# Altium PCB main.PcbDoc (part 3 of 3)
Units mm, origin at the board's own origin, x right, y up, seen from the top; angles counter-clockwise.
Board outline 60 x 99 mm, 4 copper layers (Top Layer, Ground Layer, Power Layer, Bottom Layer), stack 1.591 mm thick; 202 components, 164 nets, 893 pads, 275 vias.
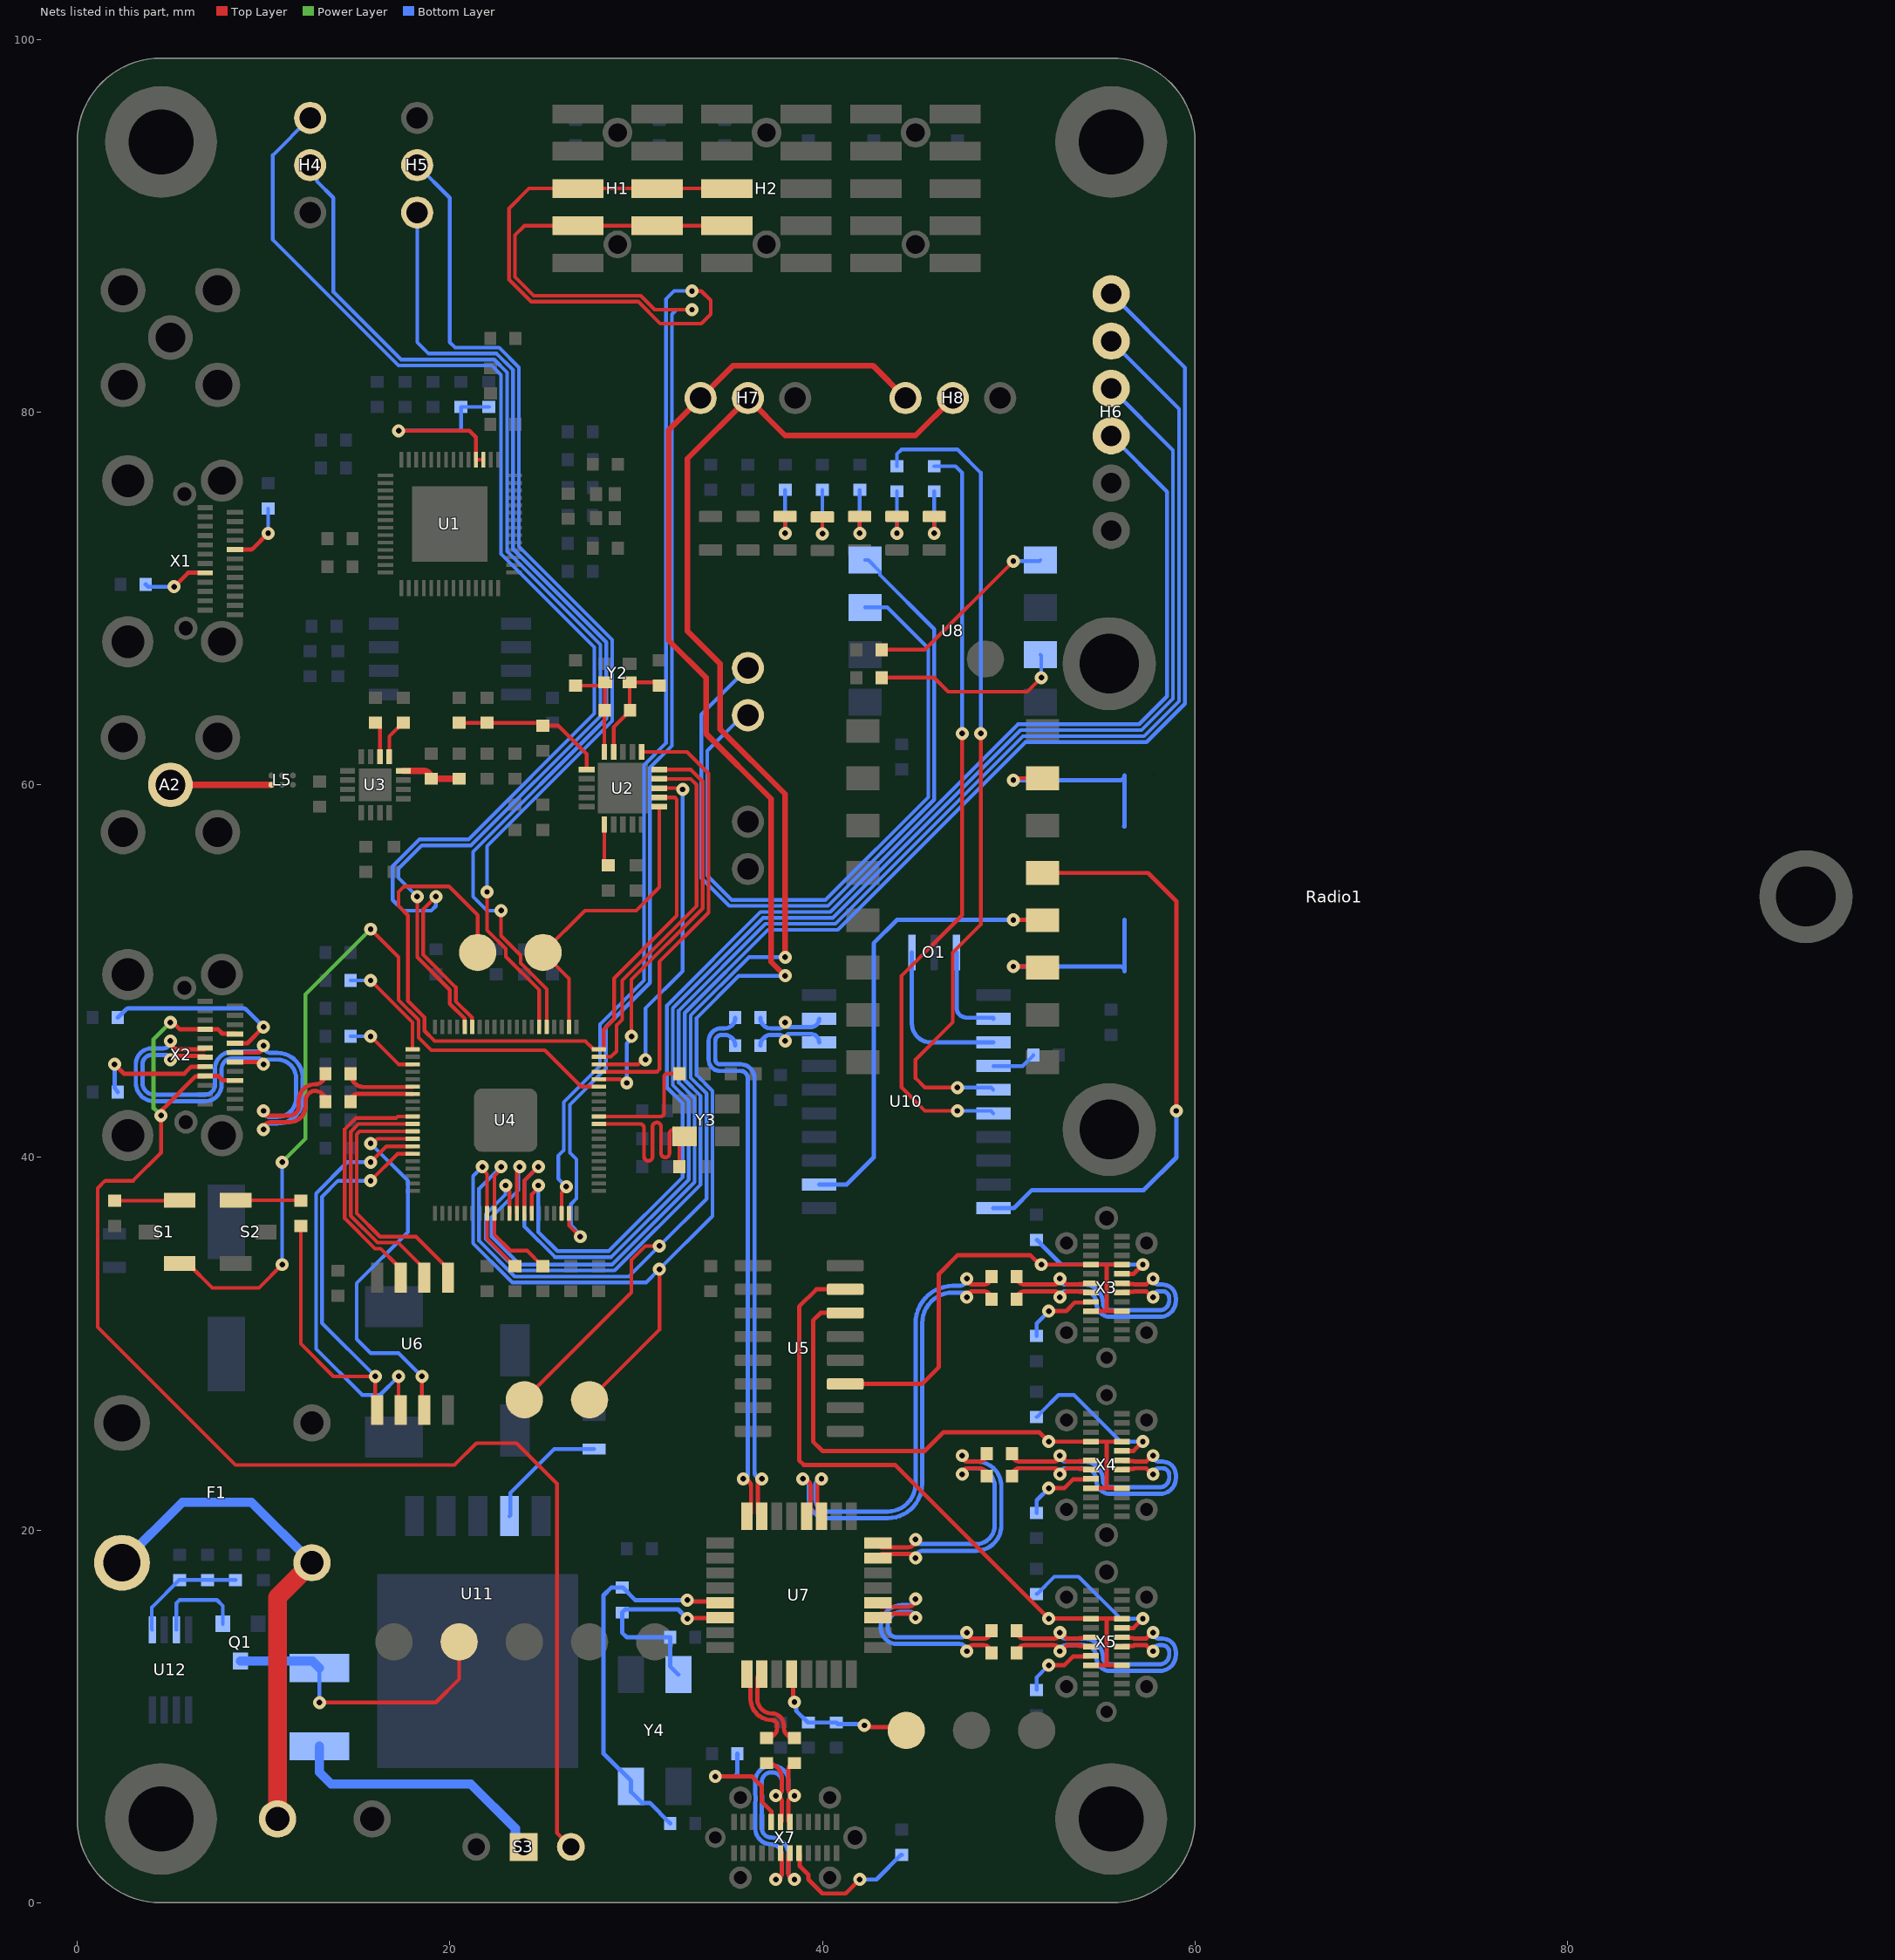
[diagram p5: the nets of this part, all layers, seen from the top]

## Via types
v1: diameter 0.7, hole 0.3, Top Layer to Bottom Layer, 275 vias

## Nets (pads, with @x,y where several pads share a name; then routed paths per layer and width w, separated by ;. In a path a pad name is that pad's centre, name@x,y a point inside that pad or via, vN(x,y) a via of type N, cw(c..) or ccw(c..) an arc to the next point about the centre after c; other vN are vias at no path point) (continued)
NetD3_1: D3.1 R27.1 | length 3.2
  Top Layer w0.2: v1(38,73.5) D3.1@38,74.4
  Bottom Layer w0.2: v1(38,73.5) R27.1@38,75.825
NetD4_1: D4.1 R25.1 | length 3.2
  Top Layer w0.2: v1(42,73.5) D4.1@42,74.4
  Bottom Layer w0.2: v1(42,73.5) R25.1@42,75.825
NetD5_1: D5.1 R31.1 | length 3.1
  Top Layer w0.2: v1(44,73.5) D5.1@44,74.4
  Bottom Layer w0.2: v1(44,73.5) R31.1@44,75.75
NetD6_1: D6.1 R30.1 | length 3.1
  Top Layer w0.2: v1(46,73.5) D6.1@46,74.4
  Bottom Layer w0.2: v1(46,73.5) R30.1@46,75.75
NetD7_1: D7.1 R26.1 | length 3.3
  Top Layer w0.2: v1(40,73.474) D7.1@40.001,74.374
  Bottom Layer w0.2: v1(40,73.474) R26.1@40,75.825
NetF1_2: F1.2 X6.1 | length 27.4
  Top Layer w1: X6.1@10.75,4.5 10.75,16.4 F1.2@12.6,18.25
  Bottom Layer w0.5: F1.2@2.4,18.25 5.65,21.5 9.35,21.5 F1.2@12.6,18.25
NetF2_1: F2.1 S3.2 | length 14.3
  Bottom Layer w0.5: F2.1@13,8.4 13,7 13.625,6.375 21.125,6.375 23.519,3.981 23.519,3.441 S3.2@23.96,3
NetL9_1: L9.1 U11.4 | length 6.7
  Bottom Layer w0.2: U11.4@23.2,20.75 23.249,20.799 23.249,21.999 25.6,24.35 L9.1@27.75,24.35
NetR4_2: R4.2 U8.1 | length 10.5
  Top Layer w0.2: R4.2@43.175,67.25 45.5,67.25 v1(50.25,72)
  Bottom Layer w0.2: v1(50.25,72) 51.645,72 U8.1@51.705,72.06
NetR5_1: R5.1 U8.3 | length 10.4
  Top Layer w0.2: R5.1@43.175,65.75 46,65.75 46.75,65 51,65 v1(51.75,65.75)
  Bottom Layer w0.2: U8.3@51.705,66.98 51.75,66.935 v1(51.75,65.75)
NetR6_2: R6.2 U3.6 | length 1.9
  Top Layer w0.2: R6.2@16,63.325 16.025,63.325 16.25,63.1 U3.6@16.25,61.5
NetR7_2: R7.2 U3.5 | length 2.2
  Top Layer w0.2: U3.5@16.75,61.5 16.75,62.6 17.475,63.325 R7.2@17.5,63.325
NetR9_2: R9.2 U2.16 | length 2.3
  Top Layer w0.2: U2.16@28.295,57.868 28.295,55.88 R9.2@28.5,55.675
NetR13_1: R13.1 S1.2 | length 3.5
  Top Layer w0.2: R13.1@2,37.675 5.475,37.675 S1.2@5.5,37.7
NetR33_2: R33.2 X1.A5 | length 3.5
  Top Layer w0.23: X1.A5@8.465,72.625 9.295,72.625 ccw(c9.295,72.83) 9.44,72.686 v1(10.25,73.5)
  Bottom Layer w0.2: v1(10.25,73.5) R33.2@10.25,74.825
NetR35_1: R35.1 X1.B5 | length 3.6
  Top Layer w0.23: v1(5.2,70.625) 5.95,71.375 X1.B5@6.865,71.375
  Bottom Layer w0.23: R35.1@3.675,70.75 3.8,70.625 v1(5.2,70.625)
NetR38_2: R38.2 X2.A5 | length 10.3
  Top Layer w0.23: X2.A5@8.465,46.125 9.125,46.125 v1(10,47)
  Bottom Layer w0.23: R38.2@2.175,47.5 2.615,47.94 cw(c2.76,47.795) 2.76,48 8.915,48 cw(c8.915,47.795) 9.06,47.94 v1(10,47)
NetR41_1: R41.1 X2.B5 | length 6.8
  Top Layer w0.23: v1(2,45) 2.5,44.5 5.75,44.5 6.125,44.875 X2.B5@6.865,44.875
  Bottom Layer w0.23: v1(2,45) 2,43.735 R41.1@2.175,43.5
NetR42_1: R42.1 X3.B5 | length 7.6
  Top Layer w0.23: X3.B5@56.085,33.75 56.7,33.75 v1(57.2,34.25)
  Bottom Layer w0.23: R42.1@51.5,35.575 51.525,35.575 51.735,35.365 51.735,35.34 52.825,34.25 v1(57.2,34.25)
NetR43_2: R43.2 X3.A5 | length 4.1
  Top Layer w0.23: v1(52.15,31.75) 53.08,31.75 53.545,32.215 54.38,32.215 X3.A5@54.415,32.25
  Bottom Layer w0.23: R43.2@51.5,30.425 51.5,31.1 v1(52.15,31.75)
NetR44_2: R44.2 X4.A5 | length 8.6
  Top Layer w0.23: X4.A5@56.085,24.25 56.7,24.25 v1(57.2,24.75)
  Bottom Layer w0.2: R44.2@51.5,26.075 51.525,26.075 51.75,26.3 51.75,26.325 52.675,27.25 53.5,27.25 56,24.75 v1(57.2,24.75)
NetR45_1: R45.1 X4.B5 | length 4.1
  Top Layer w0.23: v1@52.05,22.25 52.98,22.25 53.445,22.715 54.28,22.715 X4.B5@54.315,22.75
  Bottom Layer w0.23: R45.1@51.5,20.925 51.5,21.6 v1(52.15,22.25)
NetR48_1: R48.1 X5.B5 | length 8.3
  Top Layer w0.23: X5.B5@56.085,14.75 56.7,14.75 v1(57.2,15.25)
  Bottom Layer w0.2: R48.1@51.5,16.575 51.525,16.575 52.45,17.5 53.75,17.5 56,15.25 v1(57.2,15.25)
NetR50_2: R50.2 X5.A5 | length 4.1
  Top Layer w0.23: v1@52.05,12.75 52.98,12.75 53.445,13.215 54.28,13.215 X5.A5@54.315,13.25
  Bottom Layer w0.2: R50.2@51.5,11.425 51.5,12.1 v1(52.15,12.75)
NetR52_2: R52.2 X7.A5 | length 7.2
  Top Layer w0.23: v1(34.25,6.775) 36.225,6.775 36.738,6.262 36.738,5.437 37.25,4.924 X7.A5@37.25,4.335
  Bottom Layer w0.23: v1(34.25,6.775) 35.275,6.775 35.425,6.925 R52.2@35.425,8 R52.2@35.462,7.962
NetR53_1: R53.1 X7.B5 | length 7.8
  Top Layer w0.23: X7.B5@38.75,2.665 38.785,2.63 38.785,1.965 39.25,1.5 39.25,1.25 40,0.5 41.25,0.5 v1(42,1.25)
  Bottom Layer w0.23: v1(42,1.25) 42.9,1.25 44.225,2.575 R53.1@44.25,2.575
"NRF CE": TP3.1 U2.1 U4.42 | length 16.6
  Top Layer w0.2: U4.42@26.4,47 26.4,49.6 TP3.1@25,51 27.25,53.25 30,53.25 31.245,54.495 U2.1@31.245,58.818
"NRF CS": TP2.1 U2.2 U4.40 | length 41.1
  Top Layer w0.2: TP2.1@21.5,51 21.5,53 19.95,54.55 17.55,54.55 17.25,54.25 17.25,53.5 17.75,53 17.75,48.405 18.64,47.515 18.64,46.793 19.183,46.25 27.27,46.25 27.72,45.8 U4.40@28,45.8 28.253,45.8 28.263,45.81 28.263,46.86 28.82,47.417 28.82,49.617 32.182,52.979 32.182,59.207 32.071,59.318 U2.2@31.245,59.318
"NRF INT": U2.6 U4.37 | length 24.4
  Top Layer w0.2: U4.37@28,44.6 31.13,44.6 31.25,44.72 31.25,45.845 31.25,50.5 33.89,53.14 33.89,60.61 32.732,61.768 U2.6@30.295,61.768
"NRF MISO": U2.5 U4.36 | length 22
  Top Layer w0.2: U4.36@28,44.2 29.165,44.2 29.365,44 v1(29.5,44) ; v1(29.75,46.5) 29.75,49.547 33.57,53.367 33.57,60.18 32.932,60.818 U2.5@31.245,60.818
  Bottom Layer w0.2: v1(29.5,44) 29.5,46.115 29.75,46.365 v1(29.75,46.5)
"NRF MOSI": U2.4 U4.39 | length 19.3
  Top Layer w0.2: U4.39@28,45.4 28.65,45.4 28.95,45.7 28.95,47.095 29.25,47.395 29.25,49.5 33.25,53.5 33.25,60 32.932,60.318 U2.4@31.245,60.318
"NRF SCK": U2.3 U4.38 | length 19.2
  Top Layer w0.2: U4.38@28,45 30.115,45 30.365,45.25 v1(30.5,45.25) ; U2.3@31.245,59.818 32.432,59.818 v1(32.5,59.75)
  Bottom Layer w0.2: v1(30.5,45.25) 30.5,48 32.5,50 v1(32.5,59.75)
"NRF XTAL 1": C5.1 R8.2 U2.10 Y2.1 | length 5.4
  Top Layer w0.2: C5.1@26.75,65.325 28.175,65.325 Y2.1@28.35,65.5 28.325,65.475 R8.2@28.325,64 28.295,63.97 U2.10@28.295,61.768
"NRF XTAL 2": C6.1 R8.1 U2.9 Y2.2 | length 5.8
  Top Layer w0.2: U2.9@28.795,61.768 28.795,63.095 29.675,63.975 29.65,64 Y2.2@29.65,65.5 31.075,65.5 C6.1@31.25,65.325
"Op B (+) Input": C64.2 R46.2 R47.1 U12.5 | length 6.3
  Bottom Layer w0.2: U12.5@4.025,14.65 4,14.675 4,15.85 5.475,17.325 R47.1@5.5,17.325 R46.2@7,17.325 C64.2@8.5,17.325
"Op B Output": Q1.1 U12.7 | length 5.1
  Bottom Layer w0.2: U12.7@5.325,14.65 5.325,16.075 5.5,16.25 7.5,16.25 7.813,15.937 Q1.1@7.813,14.97
OSC1: O1.1 U10.2 | length 5.3
  Bottom Layer w0.23: O1.1@47.2,51 47.2,48.05 ccw(c47.75,48.05) 47.75,47.5 49.12,47.5 cw(c49.12,47.445) U10.2@49.175,47.445
OSC2: O1.3 U10.3 | length 8.8
  Bottom Layer w0.23: O1.3@44.8,51 44.8,47.2 ccw(c45.825,47.2) 45.825,46.175 U10.3@49.175,46.175
QSPI_SCLK: U4.71 U6.6 | length 13.6
  Top Layer w0.2: U4.71@18,41.8 15.097,41.8 14.68,41.383 14.68,36.867 16.117,35.43 17.23,35.43 18.635,34.025 U6.6@18.635,33.55
QSPI_SD0: U4.72 U6.5 | length 13.9
  Top Layer w0.2: U4.72@18,41.4 15.15,41.4 15,41.25 15,37 16.25,35.75 18.18,35.75 19.68,34.25 19.905,34.025 U6.5@19.905,33.55
QSPI_SD1: U4.74 U6.2 | length 22.3
  Top Layer w0.2: v1(15.75,39.75) 16.6,40.6 U4.74@18,40.6 ; v1(17.25,28.25) 17.25,26.565 U6.2@17.365,26.45
  Bottom Layer w0.2: v1(15.75,39.75) 14.5,39.75 12.82,38.07 12.82,29.727 15.297,27.25 16.25,27.25 v1(17.25,28.25)
QSPI_SD2: U4.73 U6.3 | length 21
  Top Layer w0.2: v1(15.75,40.75) 15.861,40.75 16.111,41 16.25,41 U4.73@18,41 ; v1(18.5,28.25) 18.5,26.585 U6.3@18.635,26.45
  Bottom Layer w0.2: v1(15.75,40.75) 17.75,38.75 17.75,36 15,33.25 15,30.25 15.75,29.5 17.25,29.5 v1(18.5,28.25)
QSPI_SD3: U4.70 U6.7 | length 13.3
  Top Layer w0.2: U6.7@17.365,33.55 17.365,34.025 17.14,34.25 16.28,35.11 15.985,35.11 14.36,36.735 14.36,41.515 14.965,42.12 17.12,42.12 17.2,42.2 U4.70@18,42.2
QSPI_SS: R14.2 U4.75 U6.1 | length 29.5
  Top Layer w0.2: R14.2@12,36.325 12,30 13.75,28.25 v1(16,28.25) 16,26.545 U6.1@16.095,26.45 ; v1(15.75,38.75) 17.19,40.19 17.99,40.19 U4.75@18,40.2
  Bottom Layer w0.2: v1(15.75,38.75) 14,38.75 13.14,37.89 13.14,31.11 v1(16,28.25)
"Radio CTS": J1.1 J2.1 Radio1.3 | length 10.6
  Top Layer w0.23: v1(50.25,60.25) cw(c50.35,60.25) 50.35,60.35 Radio1.3@51.93,60.35
  Bottom Layer w0.23: v1(50.25,60.25) 55.97,60.25 ccw(c55.97,60.5) J1.1@56.22,60.5 56.22,57.78 cw(c56.19,57.78) J2.1@56.19,57.75
"Radio RTS": J3.1 J4.1 Radio1.11 | length 10.6
  Top Layer w0.23: v1(50.25,50.25) 51.87,50.25 cw(c51.87,50.19) Radio1.11@51.93,50.19
  Bottom Layer w0.23: v1(50.25,50.25) 55.97,50.25 cw(c55.97,50) J4.1@56.22,50 J3.1@56.22,52.75
"Radio RX": Radio1.7 U10.10 | length 32.4
  Top Layer w0.23: Radio1.7@51.91,55.25 ccw(c51.91,55.27) 51.93,55.27 57.48,55.27 59,53.75 v1(59,42.5)
  Bottom Layer w0.23: U10.10@49.175,37.285 50.285,37.285 51.25,38.25 57.25,38.25 59,40 v1(59,42.5)
"Radio TX": Radio1.9 U10.12 | length 24.7
  Top Layer w0.23: v1(50.25,52.75) 51.91,52.75 cw(c51.91,52.73) Radio1.9@51.93,52.73
  Bottom Layer w0.23: U10.12@39.825,38.555 41.305,38.555 42.75,40 42.75,51.5 44,52.75 v1(50.25,52.75)
Relay_1: H9.1 U8.8 | length 42.3
  Bottom Layer w0.2: H9.1@36,66.27 33.5,63.77 33.5,55 35,53.5 40.297,53.5 46,59.203 46,68.355 43.09,71.265 43.09,71.435 42.465,72.06 U8.8@42.295,72.06
Relay_2: H9.2 U8.7 | length 36.6
  Bottom Layer w0.2: H9.2@36,63.73 35.73,63.73 33.82,61.82 33.82,55.133 35.133,53.82 40.165,53.82 45.68,59.335 45.68,67.32 43.48,69.52 U8.7@42.295,69.52
"Right Motor Control 1": H1.5 H1.6 H2.5 U4.18 | length 83.2
  Top Layer w0.2: U4.18@26,37 26,38.115 26.25,38.365 v1(26.25,38.432) ; v1(33,86.5) 33.005,86.495 33.505,86.495 34,86 34,85.25 33.5,84.75 31.297,84.75 30.117,85.93 24.367,85.93 23.18,87.117 23.18,90.93 24.25,92 H1.5@26.875,92 H1.6@31.125,92 H2.5@34.875,92
  Bottom Layer w0.2: v1(26.25,38.432) 25.82,38.862 25.82,40.09 26.12,40.39 26.12,42.965 28.06,44.905 28.06,47.142 30.42,49.502 30.42,61.05 31.6,62.23 31.6,86.057 32.043,86.5 v1(33,86.5)
"Right Motor Control 2": H1.7 H1.8 H2.7 U4.19 | length 79
  Top Layer w0.2: U4.19@26.4,37 26.4,36.35 v1(27,35.75) ; v1(33,85.5) 31,85.5 30.25,86.25 24.5,86.25 23.5,87.25 23.5,89.5 24,90 H1.7@26.875,90 H1.8@31.125,90 H2.7@34.875,90
  Bottom Layer w0.2: v1(27,35.75) 27,35.861 26.5,36.361 26.5,37.5 26.8,37.8 26.8,39.897 26.44,40.257 26.44,42.832 28.38,44.772 28.38,47.01 30.74,49.37 30.74,60.917 31.92,62.097 31.92,85.25 32.17,85.5 v1(33,85.5)
RP2350-USB-5V-VIN: S3.1 X2.A4 X2.A9 X2.B4 X2.B9 | length 76.9
  Top Layer w0.2: v1(4.5,42.25) 4.5,40.25 3,38.75 1.5,38.75 1.1,38.35 1.1,30.9 8.5,23.5 20.25,23.5 21.421,24.671 23.579,24.671 25.75,22.5 25.75,3.75 S3.1@26.5,3
  Top Layer w0.23: v1(4.5,42.25) 4.59,42.34 4.59,42.59 6.355,44.355 6.845,44.355 X2.B4@6.865,44.375 7.56,44.375 7.79,44.145 8.445,44.145 X2.A9@8.465,44.125 ; v1(5,47.25) 5.127,47.25 5.502,46.875 X2.B9@6.865,46.875 7.56,46.875 7.79,46.645 8.445,46.645 X2.A4@8.465,46.625
  Power Layer w0.23: v1(4.5,42.25) 4.101,42.649 4.101,46.351 v1(5,47.25)
RP2350_D_N: R10.1 X2.A7 X2.B7 | length 27.5
  Top Layer w0.23: v1(5,46.25) ccw(c5.446,46.25) 5.446,45.804 6.794,45.804 ccw(c6.794,45.875) X2.B7@6.865,45.875 ; X2.A7@8.465,45.125 9.875,45.125 cw(c9.875,45) v1(10,45) ; v1(10,42.5) ccw(c10.25,42.5) 10.25,42.25 11.393,42.25 ccw(c11.393,42.75) 11.893,42.75 11.893,43.046 cw(c12.775,43.046) 12.775,43.929 ccw(c12.775,44.479) 13.325,44.479 R10.1@13.325,44.5
  Bottom Layer w0.23: v1(5,46.25) cw(c4.607,46.25) 4.607,45.857 4,45.857 ccw(c4,45) 3.143,45 3.143,44 ccw(c4.125,44) 4.125,43.018 6.865,43.018 ccw(c6.865,43.903) 7.75,43.903 7.75,44.75 cw(c8.321,44.75) 8.321,45.321 9.679,45.321 cw(c9.679,45) v1(10,45) cw(c10.25,45) 10.25,45.25 10.75,45.25 cw(c10.75,44.25) 11.75,44.25 11.75,43.179 cw(c10.75,43.179) 10.75,42.179 10.321,42.179 cw(c10.321,42.5) v1(10,42.5)
RP2350_D_P: R12.1 X2.A6 X2.B6 | length 27.6
  Top Layer w0.23: v1(5,45.25) cw(c5.196,45.25) 5.196,45.446 6.794,45.446 cw(c6.794,45.375) X2.B6@6.865,45.375 ; X2.A6@8.465,45.625 9.625,45.625 ccw(c9.625,46) v1(10,46) ; v1(10,41.5) cw(c10.393,41.5) 10.393,41.893 11.393,41.893 ccw(c11.393,42.75) 12.25,42.75 12.25,43.046 cw(c12.775,43.046) 12.775,43.571 cw(c12.775,43.021) 13.325,43.021 R12.1@13.325,43
  Bottom Layer w0.23: v1(5,45.25) ccw(c4.75,45.25) 4.75,45.5 4,45.5 ccw(c4,45) 3.5,45 3.5,44 ccw(c4.125,44) 4.125,43.375 6.865,43.375 ccw(c6.865,43.903) 7.393,43.903 7.393,44.75 cw(c8.321,44.75) 8.321,45.679 9.679,45.679 ccw(c9.679,46) v1(10,46) ccw(c10.393,46) 10.393,45.607 10.75,45.607 cw(c10.75,44.25) 12.107,44.25 12.107,43.179 cw(c10.75,43.179) 10.75,41.821 10.321,41.821 ccw(c10.321,41.5) v1(10,41.5)
RP2350_DX_N: R10.2 U4.66 | length 3.7
  Top Layer w0.23: R10.2@14.675,44.5 ccw(c15.396,44.5) 15.396,43.779 17.979,43.779 ccw(c17.979,43.8) U4.66@18,43.8
RP2350_DX_P: R12.2 U4.67 | length 3.6
  Top Layer w0.23: R12.2@14.675,43 cw(c15.096,43) 15.096,43.421 17.979,43.421 cw(c17.979,43.4) U4.67@18,43.4
RUN: S1.1 U4.35 | length 44.2
  Top Layer w0.2: S1.1@5.5,34.3 5.95,34.3 7.25,33 9.75,33 v1(11,34.25) ; v1(15.75,52.25) 17.25,50.75 17.25,48.453 18.32,47.383 18.32,46.43 19,45.75 25.1,45.75 27.05,43.8 U4.35@28,43.8
  Power Layer w0.2: v1(11,39.75) 12.25,41 12.25,48.75 v1(15.75,52.25)
  Bottom Layer w0.2: v1(11,34.25) v1(11,39.75)
RXLED: R30.2 U10.6 | length 41.5
  Top Layer w0.2: v1(47.25,42.5) 45.5,42.5 44.25,43.75 44.25,49.75 47.5,53 v1(47.5,62.75)
  Bottom Layer w0.2: R30.2@46,77.1 47.15,77.1 47.5,76.75 v1(47.5,62.75) ; v1(47.25,42.5) 49.04,42.5 U10.6@49.175,42.365
SCL: H7.2 H8.2 R16.1 TP4.1 U4.9 | length 100.9
  Top Layer w0.2: v1(22.75,39.5) 22.75,39.365 22.4,39.015 U4.9@22.4,37 22.4,35.85 23.25,35 24.15,35 24.975,34.175 R16.1@25,34.175 ; TP4.1@24,27 24.25,27 24.25,27.25 29.75,32.75 29.75,34.5 30.5,35.25 v1(31.25,35.25)
  Top Layer w0.3: v1(38,50.75) 38,59.5 34.5,63 34.5,66.5 32.75,68.25 32.75,77.5 H7.2@36,80.75 38,78.75 45,78.75 H8.2@47,80.75
  Bottom Layer w0.2: v1(22.75,39.5) 21.57,38.32 21.57,35.525 23.485,33.61 29.61,33.61 v1(31.25,35.25) 33.78,37.78 33.78,43.431 32.93,44.281 32.93,47.62 36.06,50.75 v1(38,50.75)
SDA: H7.1 H8.1 R15.1 TP5.1 U4.8 | length 97.6
  Top Layer w0.2: v1(21.75,39.5) 21.75,39.365 22,39.115 U4.8@22,37 22,35.65 23.475,34.175 R15.1@23.5,34.175 ; TP5.1@27.5,27 31.25,30.75 v1(31.25,34)
  Top Layer w0.3: v1(38,49.75) 37.25,50.5 37.25,59.25 33.75,62.75 33.75,65.75 31.75,67.75 31.75,79.04 H7.1@33.46,80.75 35.21,82.5 42.71,82.5 H8.1@44.46,80.75
  Bottom Layer w0.2: v1(21.75,39.5) 21.25,39 21.25,35.392 23.352,33.29 30.54,33.29 v1(31.25,34) 34.1,36.85 34.1,43.563 33.25,44.413 33.25,47.487 35.513,49.75 v1(38,49.75)
"Servo 1 PWM": H6.1 U4.11 | length 86
  Top Layer w0.2: v1(23,38.5) 23,38.365 23.2,38.165 U4.11@23.2,37
  Bottom Layer w0.2: v1(23,38.5) 22.985,38.485 22.985,38.004 21.93,36.949 21.93,35.617 23.612,33.936 23.617,33.93 28.845,33.93 33.46,38.545 33.46,43.298 32.61,44.148 32.61,47.752 37.078,52.22 40.828,52.22 50.898,62.29 57.398,62.29 59.46,64.352 59.46,82.39 H6.1@55.5,86.35
"Servo 2 PWM": H6.2 U4.12 | length 84.4
  Top Layer w0.2: U4.12@23.6,37 23.6,39.215 23.75,39.365 v1(23.75,39.5)
  Bottom Layer w0.2: v1(23.75,39.5) 23.68,39.43 23.68,38.247 22.25,36.817 22.25,35.75 23.75,34.25 28.713,34.25 33.14,38.677 33.14,43.166 32.29,44.016 32.29,47.885 36.945,52.54 40.695,52.54 50.765,62.61 57.265,62.61 59.14,64.485 59.14,80.17 H6.2@55.5,83.81
"Servo 3 PWM": H6.3 U4.13 | length 78.9
  Top Layer w0.2: U4.13@24,37 24,38.75 v1(24.75,39.5)
  Bottom Layer w0.2: v1(24.75,39.5) 24,38.75 24,36.297 25.642,34.655 28.665,34.655 32.82,38.81 32.82,43.033 31.97,43.883 31.97,48.017 36.813,52.86 40.563,52.86 50.633,62.93 57.133,62.93 58.82,64.617 58.82,77.95 H6.3@55.5,81.27
"Servo 4 PWM": H6.4 U4.14 | length 72.5
  Top Layer w0.2: U4.14@24.4,37 24.4,38.015 24.75,38.365 v1(24.75,38.5)
  Bottom Layer w0.2: v1(24.75,38.5) 24.75,36 25.775,34.975 28.533,34.975 32.5,38.942 32.5,42.9 31.65,43.75 31.65,48.15 36.68,53.18 40.43,53.18 50.5,63.25 57,63.25 58.5,64.75 58.5,75.73 H6.4@55.5,78.73
"SMA Antenna": A2.1 L5.1 | length 5.4
  Top Layer w0.35: A2.1@5,60 L5.1@10.423,60
TXLED: R31.2 U10.5 | length 44.2
  Top Layer w0.2: v1(47.25,43.75) 45.5,43.75 45,44.25 45,45.25 47,47.25 47,51 48.5,52.5 v1(48.5,62.75)
  Bottom Layer w0.2: R31.2@44,77.1 44,77.75 44.25,78 47.25,78 48.5,76.75 v1(48.5,62.75) ; v1(47.25,43.75) 49.06,43.75 U10.5@49.175,43.635
TXRX: C9.1 C10.1 U3.4 | length 3.2
  Top Layer w0.35: U3.4@17.5,60.75 18.575,60.75 cw(c18.575,60.325) C9.1@19,60.325 C10.1@20.5,60.325
U\S\B\_\B\O\O\T\: R14.1 S2.1 | length 3.5
  Top Layer w0.2: S2.1@8.5,37.7 11.975,37.7 R14.1@12,37.675
"UART0 RX": H4.2 U4.56 | length 63.1
  Top Layer w0.2: v1(18.25,54) 18.25,50.75 20,49 20,48.25 20.79,47.46 20.79,47.01 U4.56@20.8,47
  Bottom Layer w0.2: H4.2@12.5,93.25 12.792,92.958 12.792,92.546 12.868,92.469 12.868,92.382 13.75,91.5 13.75,86.453 17.383,82.82 22.383,82.82 23.07,82.133 23.07,72.525 28.08,67.515 28.08,63.688 21.142,56.75 18.5,56.75 17.25,55.5 17.25,55 v1(18.25,54)
"UART0 TX": H4.3 U4.55 | length 70.4
  Top Layer w0.2: v1(19.25,54) 18.57,53.32 18.57,50.883 20.32,49.133 20.32,48.383 21.19,47.513 21.19,47.01 U4.55@21.2,47
  Bottom Layer w0.2: H4.3@12.5,95.79 10.5,93.79 10.5,89.25 17.25,82.5 22.25,82.5 22.75,82 22.75,72.392 27.76,67.382 27.76,63.82 21.01,57.07 18.367,57.07 16.93,55.633 16.93,53.82 17.5,53.25 19,53.25 19.245,53.495 19.245,53.995 v1(19.25,54)
"UART1 RX": H5.2 U4.46 | length 55.9
  Top Layer w0.2: v1(22,54.25) 22,52.197 23,51.197 23,50.778 24.8,48.978 24.8,48.134 U4.46@24.8,47
  Bottom Layer w0.2: H5.2@18.25,93.25 20,91.5 20,83.75 20.29,83.46 22.648,83.46 23.71,82.398 23.71,72.79 28.72,67.78 28.72,63.423 22,56.703 v1(22,54.25)
"UART1 TX": H5.3 U4.45 | length 55.1
  Top Layer w0.2: v1(22.75,53.25) 22.75,51.9 23.8,50.85 23.8,50.43 25.2,49.03 U4.45@25.2,47
  Bottom Layer w0.2: H5.3@18.25,90.71 18.25,83.75 18.86,83.14 22.515,83.14 23.39,82.265 23.39,72.657 28.4,67.647 28.4,63.555 21.25,56.405 21.25,54 22,53.25 v1(22.75,53.25)
USB0_D_N: R24.1 X7.A7 X7.B7 | length 15.3
  Top Layer w0.23: v1(37.5,1.25) ccw(c37.5,1.571) 37.821,1.571 37.821,2.594 ccw(c37.75,2.594) X7.B7@37.75,2.665 ; X7.A7@38.25,4.335 cw(c38.25,4.406) 38.179,4.406 38.179,5.429 cw(c38.5,5.429) v1(38.5,5.75) cw(c38.5,6.071) 38.179,6.071 38.179,7.179 cw(c38.5,7.179) R24.1@38.5,7.5
  Bottom Layer w0.23: v1(37.5,1.25) ccw(c37.5,1.571) 37.821,1.571 37.821,2.571 ccw(c37.25,2.571) 37.25,3.143 cw(c37.25,4) 36.393,4 36.393,5.25 cw(c36.75,5.25) 36.394,5.272 36.414,5.6 ccw(c35.6,5.65) 36.402,5.795 cw(c36.98,5.899) 36.393,5.899 36.393,6.5 cw(c37.25,6.5) 37.25,7.357 37.321,7.357 cw(c37.321,6.5) 38.179,6.5 38.179,6.071 ccw(c38.5,6.071) v1(38.5,5.75)
USB0_D_P: R23.1 X7.A6 X7.B6 | length 14.5
  Top Layer w0.23: R23.1@37,7.5 cw(c37,6.679) 37.821,6.679 37.821,6.071 cw(c37.5,6.071) v1(37.5,5.75) cw(c37.5,5.429) 37.821,5.429 37.821,4.406 cw(c37.75,4.406) X7.A6@37.75,4.335 ; X7.B6@38.25,2.665 ccw(c38.25,2.594) 38.179,2.594 38.179,1.571 ccw(c38.5,1.571) v1(38.5,1.25)
  Bottom Layer w0.23: v1(37.5,5.75) ccw(c37.5,6.071) 37.821,6.071 37.821,6.5 ccw(c37.321,6.5) 37.321,7 37.25,7 ccw(c37.25,6.5) 36.75,6.5 36.75,5.899 ccw(c36.98,5.899) 36.754,5.859 cw(c35.6,5.65) 36.77,5.578 36.75,5.25 36.75,4 ccw(c37.25,4) 37.25,3.5 cw(c37.25,2.571) 38.179,2.571 38.179,1.571 ccw(c38.5,1.571) v1(38.5,1.25)
USB0_DX_N: R24.2 U7.2 | length 4.7
  Top Layer w0.23: U7.2@36.75,12.262 ccw(c36.75,12.012) 36.5,12.012 36.5,10.957 ccw(c37.3,10.957) 37.3,10.157 cw(c37.3,9.529) 37.929,9.529 37.929,9.4 ccw(c38.479,9.4) 38.479,8.85 R24.2@38.5,8.85
USB0_DX_P: R23.2 U7.1 | length 4.7
  Top Layer w0.23: U7.1@35.95,12.262 cw(c35.95,12.069) 36.143,12.069 36.143,10.957 ccw(c37.3,10.957) 37.3,9.8 cw(c37.3,9.529) 37.571,9.529 37.571,9.4 cw(c37.021,9.4) 37.021,8.85 R23.2@37,8.85
USB1_D_N: R21.1 X5.A7 X5.B7 | length 14.9
  Top Layer w0.23: R21.1@50.425,14.6 ccw(c50.846,14.6) 50.846,14.178 52.429,14.178 ccw(c52.429,14.5) v1(52.75,14.5) 52.798,14.5 53.12,14.178 53.78,14.178 53.816,14.215 54.38,14.215 X5.A7@54.415,14.25 ; X5.B7@56.085,13.75 56.12,13.784 56.684,13.784 56.72,13.821 57.38,13.821 57.702,13.5 v1(57.75,13.5)
  Bottom Layer w0.23: v1(52.75,14.5) ccw(c53.071,14.5) 53.071,14.178 54.064,14.178 cw(c54.064,13.183) 55.06,13.183 ccw(c55.441,13.183) 55.441,12.802 58.108,12.802 ccw(c58.108,13.31) 58.616,13.31 58.616,13.455 ccw(c58.25,13.455) 58.25,13.821 58.071,13.821 ccw(c58.071,13.5) v1(57.75,13.5)
USB1_D_P: R22.1 X5.A6 X5.B6 | length 16.1
  Top Layer w0.23: R22.1@50.425,13.4 cw(c50.846,13.4) 50.846,13.821 52.429,13.821 cw(c52.429,13.5) v1(52.75,13.5) 52.798,13.5 53.12,13.821 53.78,13.821 53.816,13.784 54.38,13.784 X5.A6@54.415,13.75 ; X5.B6@56.085,14.25 56.12,14.215 56.684,14.215 56.72,14.178 57.38,14.178 57.702,14.5 v1(57.75,14.5)
  Bottom Layer w0.23: v1(52.75,13.5) cw(c53.071,13.5) 53.071,13.821 54.064,13.821 cw(c54.064,13.183) 54.703,13.183 ccw(c55.441,13.183) 55.441,12.445 58.108,12.445 ccw(c58.108,13.31) 58.973,13.31 58.973,13.455 ccw(c58.25,13.455) 58.25,14.178 58.071,14.178 cw(c58.071,14.5) v1(57.75,14.5)
USB1_DX_N: R21.2 U7.11 | length 10.9
  Top Layer w0.23: U7.11@42.988,15.3 cw(c43.209,15.3) 43.209,15.521 44.779,15.521 cw(c44.779,15.3) v1(45,15.3) ; v1(47.75,14.5) ccw(c48.071,14.5) 48.071,14.178 48.654,14.178 ccw(c48.654,14.6) R21.2@49.075,14.6
  Bottom Layer w0.23: v1(45,15.3) ccw(c44.679,15.3) 44.679,15.621 44.25,15.621 ccw(c44.25,14.871) 43.5,14.871 43.5,14.75 ccw(c44,14.75) 44,14.25 47.5,14.25 ccw(c47.5,14.5) v1(47.75,14.5)
USB1_DX_P: R22.2 U7.12 | length 12.2
  Top Layer w0.23: U7.12@42.988,16.1 ccw(c43.209,16.1) 43.209,15.879 44.579,15.879 ccw(c44.579,16.3) v1(45,16.3) ; v1(47.75,13.5) cw(c48.071,13.5) 48.071,13.821 48.654,13.821 cw(c48.654,13.4) R22.2@49.075,13.4
  Bottom Layer w0.23: v1(45,16.3) cw(c44.679,16.3) 44.679,15.979 44.25,15.979 ccw(c44.25,14.871) 43.143,14.871 43.143,14.75 ccw(c44,14.75) 44,13.893 47.357,13.893 cw(c47.357,13.5) v1(47.75,13.5)
USB1_VOUT: U5.15 X5.A4 X5.A9 X5.B4 X5.B9 | length 36.1
  Top Layer w0.23: U5.15@41.225,32.925 39.675,32.925 38.75,32 38.75,23.75 39,23.5 43.9,23.5 v1(52.15,15.25) X5.A9@54.415,15.25 55.25,15.25 ; X5.A4@54.415,12.75 55.25,12.75 ; X5.B9@56.085,12.75 55.25,12.75 ; X5.B4@56.085,15.25 55.25,15.25 ; 55.25,12.75 55.25,15.25
USB2_D_N: R19.1 X4.A7 X4.B7 | length 15.2
  Top Layer w0.23: R19.1@50.175,24.1 ccw(c50.596,24.1) 50.596,23.679 52.429,23.679 ccw(c52.429,24) v1(52.75,24) 52.798,24 53.12,23.679 53.78,23.679 53.816,23.715 54.38,23.715 X4.B7@54.415,23.75 ; X4.A7@56.085,23.25 56.12,23.285 56.684,23.285 56.72,23.321 57.38,23.321 57.702,23 v1(57.75,23)
  Bottom Layer w0.23: v1(52.75,24) ccw(c53.071,24) 53.071,23.679 54.064,23.679 cw(c54.064,22.683) 55.06,22.683 ccw(c55.441,22.683) 55.441,22.302 58.108,22.302 ccw(c58.108,22.81) 58.616,22.81 58.616,22.955 ccw(c58.25,22.955) 58.25,23.321 58.071,23.321 ccw(c58.071,23) v1(57.75,23)
USB2_D_P: R20.1 X4.A6 X4.B6 | length 16.3
  Top Layer w0.23: R20.1@50.175,22.9 cw(c50.596,22.9) 50.596,23.321 52.429,23.321 cw(c52.429,23) v1(52.75,23) 52.798,23 53.12,23.321 53.78,23.321 53.816,23.285 54.38,23.285 X4.B6@54.415,23.25 ; X4.A6@56.085,23.75 56.12,23.715 56.684,23.715 56.72,23.679 57.38,23.679 57.702,24 v1(57.75,24)
  Bottom Layer w0.23: v1(52.75,23) cw(c53.071,23) 53.071,23.321 54.064,23.321 cw(c54.064,22.683) 54.703,22.683 ccw(c55.441,22.683) 55.441,21.945 58.129,21.945 ccw(c58.129,22.789) 58.973,22.789 58.973,22.955 ccw(c58.25,22.955) 58.25,23.679 58.071,23.679 cw(c58.071,24) v1(57.75,24)
USB2_DX_N: R19.2 U7.15 | length 14.8
  Top Layer w0.23: U7.15@42.988,18.5 cw(c43.209,18.5) 43.209,18.721 44.779,18.721 cw(c44.779,18.5) v1(45,18.5) ; v1(47.5,24) ccw(c47.821,24) 47.821,23.679 48.404,23.679 ccw(c48.404,24.1) R19.2@48.825,24.1
  Bottom Layer w0.23: v1(45,18.5) cw(c45.393,18.5) 45.393,18.893 48.25,18.893 ccw(c48.25,20.25) 49.607,20.25 49.607,22.346 ccw(c48.275,22.346) 48.275,23.679 47.821,23.679 cw(c47.821,24) v1(47.5,24)
USB2_DX_P: R20.2 U7.16 | length 13.7
  Top Layer w0.23: U7.16@42.988,19.3 ccw(c43.209,19.3) 43.209,19.079 44.579,19.079 ccw(c44.579,19.5) v1(45,19.5) ; v1(47.5,23) cw(c47.821,23) 47.821,23.321 48.404,23.321 cw(c48.404,22.9) R20.2@48.825,22.9
  Bottom Layer w0.23: v1(45,19.5) ccw(c45.25,19.5) 45.25,19.25 48.25,19.25 ccw(c48.25,20.25) 49.25,20.25 49.25,22.346 ccw(c48.275,22.346) 48.275,23.321 47.821,23.321 ccw(c47.821,23) v1(47.5,23)
USB2_VOUT: U5.14 X4.A4 X4.A9 X4.B4 X4.B9 | length 30
  Top Layer w0.23: U5.14@41.225,31.655 39.905,31.655 39.5,31.25 39.5,24.75 40,24.25 45.5,24.25 46.5,25.25 51.65,25.25 v1(52.15,24.75) X4.B9@54.415,24.75 55.25,24.75 ; X4.B4@54.415,22.25 55.25,22.25 ; X4.A9@56.085,22.25 55.25,22.25 ; X4.A4@56.085,24.75 55.25,24.75 ; 55.25,22.25 55.25,24.75
USB3_D_N: R17.1 X3.A7 X3.B7 | length 14.9
  Top Layer w0.23: R17.1@50.425,33.6 ccw(c50.846,33.6) 50.846,33.179 52.429,33.179 ccw(c52.429,33.5) v1(52.75,33.5) 52.798,33.5 53.12,33.179 53.78,33.179 53.816,33.215 54.38,33.215 X3.A7@54.415,33.25 ; X3.B7@56.085,32.75 56.12,32.785 56.684,32.785 56.72,32.821 57.38,32.821 57.702,32.5 v1(57.75,32.5)
  Bottom Layer w0.23: v1(52.75,33.5) ccw(c53.071,33.5) 53.071,33.179 54.064,33.179 cw(c54.064,32.183) 55.06,32.183 ccw(c55.441,32.183) 55.441,31.802 58.108,31.802 ccw(c58.108,32.31) 58.616,32.31 58.616,32.455 ccw(c58.25,32.455) 58.25,32.821 58.071,32.821 ccw(c58.071,32.5) v1(57.75,32.5)
USB3_D_P: R18.1 X3.A6 X3.B6 | length 16.1
  Top Layer w0.23: R18.1@50.425,32.4 cw(c50.846,32.4) 50.846,32.821 52.429,32.821 cw(c52.429,32.5) v1(52.75,32.5) 52.798,32.5 53.12,32.821 53.78,32.821 53.816,32.785 54.38,32.785 X3.A6@54.415,32.75 ; X3.B6@56.085,33.25 56.12,33.215 56.684,33.215 56.72,33.179 57.38,33.179 57.702,33.5 v1(57.75,33.5)
  Bottom Layer w0.23: v1(52.75,32.5) cw(c53.071,32.5) 53.071,32.821 54.064,32.821 cw(c54.064,32.183) 54.703,32.183 ccw(c55.441,32.183) 55.441,31.445 58.108,31.445 ccw(c58.108,32.31) 58.973,32.31 58.973,32.455 ccw(c58.25,32.455) 58.25,33.179 58.071,33.179 cw(c58.071,33.5) v1(57.75,33.5)
USB3_DX_N: R17.2 U7.19 | length 24.6
  Top Layer w0.23: U7.19@39.95,20.738 cw(c39.95,20.959) 39.729,20.959 39.729,22.529 cw(c39.95,22.529) v1(39.95,22.75) ; v1(47.75,33.5) ccw(c48.071,33.5) 48.071,33.179 48.654,33.179 ccw(c48.654,33.6) R17.2@49.075,33.6
  Bottom Layer w0.23: v1(39.95,22.75) ccw(c39.95,22.429) 39.629,22.429 39.629,21.621 ccw(c40.25,21.621) 40.25,21 43.5,21 ccw(c43.5,22.5) 45,22.5 45,31.107 cw(c47,31.107) 47,33.107 47.357,33.107 ccw(c47.357,33.5) v1(47.75,33.5)
USB3_DX_P: R18.2 U7.20 | length 25.2
  Top Layer w0.23: v1(38.95,22.75) cw(c38.95,22.329) 39.371,22.329 39.371,20.959 cw(c39.15,20.959) U7.20@39.15,20.738 ; v1(47.75,32.5) cw(c48.071,32.5) 48.071,32.821 48.654,32.821 cw(c48.654,32.4) R18.2@49.075,32.4
  Bottom Layer w0.23: v1(38.95,22.75) cw(c38.95,22.429) 39.271,22.429 39.271,21.621 ccw(c40.25,21.621) 40.25,20.643 43.5,20.643 ccw(c43.5,22.5) 45.357,22.5 45.357,31.107 cw(c47,31.107) 47,32.75 47.5,32.75 cw(c47.5,32.5) v1(47.75,32.5)
USB3_VOUT: U5.11 X3.A4 X3.A9 X3.B4 X3.B9 | length 25
  Top Layer w0.23: U5.11@41.225,27.845 45.345,27.845 46.25,28.75 46.25,33.75 47.25,34.75 51.175,34.75 51.675,34.25 v1(51.75,34.25) ; v1(51.75,34.25) X3.A9@54.415,34.25 55.25,34.25 ; X3.A4@54.415,31.75 55.25,31.75 ; X3.B9@56.085,31.75 55.25,31.75 ; X3.B4@56.085,34.25 55.25,34.25 ; 55.25,31.75 55.25,34.25
USB4_D_N: R39.1 U10.18 | length 4.2
  Bottom Layer w0.23: R39.1@36.675,46 36.675,46.021 cw(c37.225,46.021) 37.225,46.571 37.679,46.571 cw(c37.679,46.25) v1(38,46.25) 38,46.381 cw(c38.25,46.381) 38.25,46.631 39.369,46.631 cw(c39.369,46.175) U10.18@39.825,46.175
USB4_D_P: R37.1 U10.19 | length 4.1
  Bottom Layer w0.23: R37.1@36.675,47.5 36.675,47.479 ccw(c37.225,47.479) 37.225,46.929 37.679,46.929 ccw(c37.679,47.25) v1(38,47.25) 38,47.239 ccw(c38.25,47.239) 38.25,46.989 39.369,46.989 ccw(c39.369,47.445) U10.19@39.825,47.445
USB4_DX_N: R39.2 U7.23 | length 29.3
  Top Layer w0.23: U7.23@36.75,20.738 cw(c36.75,20.959) 36.529,20.959 36.529,22.529 cw(c36.75,22.529) v1(36.75,22.75)
  Bottom Layer w0.23: R39.2@35.325,46 ccw(c34.754,46) 34.754,46.571 34.571,46.571 ccw(c34.571,46.25) 34.25,46.25 34.25,45.25 ccw(c34.5,45.25) 34.5,45 35.607,45 cw(c35.607,44.25) 36.357,44.25 36.357,23.143 ccw(c36.75,23.143) v1(36.75,22.75)
USB4_DX_P: R37.2 U7.24 | length 29.8
  Top Layer w0.23: v1(35.75,22.75) cw(c35.75,22.329) 36.171,22.329 36.171,20.959 cw(c35.95,20.959) U7.24@35.95,20.738
  Bottom Layer w0.23: R37.2@35.325,47.5 cw(c34.754,47.5) 34.754,46.929 34.571,46.929 ccw(c34.571,46.25) 33.893,46.25 33.893,45.25 ccw(c34.5,45.25) 34.5,44.643 35.607,44.643 cw(c35.607,44.25) 36,44.25 36,23 cw(c35.75,23) v1(35.75,22.75)
"USB XTAL 1": C65.1 R49.2 U7.30 Y4.1 | length 11.5
  Top Layer w0.23: v1(32.75,15.25) 32.775,15.275 34.487,15.275 U7.30@34.512,15.3
  Bottom Layer w0.23: Y4.1@32.27,12.25 31.825,12.695 C65.1@31.825,14.25 29.5,14.25 29.25,14.5 R49.2@29.25,15.575 29.425,15.75 32.25,15.75 v1(32.75,15.25)
"USB XTAL 2": C68.1 R49.1 U7.29 Y4.3 | length 20.7
  Top Layer w0.23: v1(32.75,16.25) 32.825,16.175 34.437,16.175 U7.29@34.512,16.1
  Bottom Layer w0.23: R49.1@29.25,16.925 28.675,16.925 28.25,16.5 28.25,8.005 29.12,7.135 29.145,7.135 29.73,6.55 29.73,5.95 30.315,5.365 30.735,5.365 31.825,4.275 C68.1@31.825,4.25 ; R49.1@29.275,16.925 29.95,16.25 v1(32.75,16.25)
USB-Reset: C67.2 R51.2 TP11.1 U7.4 | length 8.4
  Top Layer w0.23: U7.4@38.35,12.262 38.425,12.187 38.425,10.85 v1(38.5,10.775) ; v1(42.25,9.525) 42.34,9.435 44.315,9.435 TP11.1@44.5,9.25
  Bottom Layer w0.23: v1(38.5,10.775) 38.59,10.685 38.59,10.31 39.225,9.675 C67.2@39.25,9.675 R51.2@40.75,9.675 40.825,9.6 42.175,9.6 v1(42.25,9.525)
USB-UART_RESET: R40.1 U10.4 | length 2.4
  Bottom Layer w0.2: U10.4@49.175,44.905 50.755,44.905 51.325,45.475 R40.1@51.325,45.5
USB-VIN: F2.2 Q1.3 TP7.1 | length 16.3
  Top Layer w0.2: v1(13,10.75) 19.25,10.75 20.5,12 TP7.1@20.5,14
  Bottom Layer w0.2: v1(13,10.75) F2.2@13,12.6
  Bottom Layer w0.5: Q1.3@8.763,12.97 12.63,12.97 F2.2@13,12.6
VDD3P3-A: C30.2 L6.2 U1.3 U1.4 | length 12
  Top Layer w0.2: v1(17.25,79) 21.05,79 21.4,78.65 U1.4@21.4,77.45 U1.3@21.8,77.45
  Bottom Layer w0.2: v1(17.25,79) 20.489,79 20.6,79.111 L6.2@20.6,80.275 C30.2@22.1,80.275
VDD_PA: C7.2 C8.2 L2.2 U2.11 | length 8.4
  Top Layer w0.2: C7.2@20.5,63.325 C8.2@22,63.325 24.85,63.325 L2.2@25,63.175 25.825,63.175 27.345,61.655 U2.11@27.345,60.818
VREG_AVDD: R36.1 U4.61 | length 5.7
  Top Layer w0.2: v1(15.75,49.5) 18,47.25 U4.61@18,45.8
  Bottom Layer w0.2: R36.1@14.675,49.5 v1(15.75,49.5)
VREG_LX: L7.2 U4.63 | length 3.9
  Top Layer w0.2: v1(15.75,46.5) 17.25,45 U4.63@18,45
  Bottom Layer w0.2: L7.2@14.675,46.5 v1(15.75,46.5)
XIN: C18.2 U4.30 Y3.1 | length 13.1
  Top Layer w0.2: U4.30@28,41.8 28.739,41.8 30.201,41.8 cw(c30.201,41.573) 30.428,41.573 30.428,40.043 ccw(c30.655,40.043) 30.882,40.043 30.882,41.653 cw(c31.109,41.653) 31.336,41.653 31.336,40.229 ccw(c31.563,40.229) 31.79,40.229 31.79,41.262 cw(c32.017,41.262) 32.178,41.422 32.475,41.125 Y3.1@32.6,41.125 32.325,40.851 C18.2@32.325,39.5
XOUT: R11.1 U4.31 | length 6.5
  Top Layer w0.2: U4.31@28,42.2 31.31,42.2 ccw(c31.31,42.39) 31.5,42.39 31.5,44.31 cw(c31.69,44.31) 31.69,44.5 R11.1@32.325,44.5
pads on no net: H1.X H2.X H3.X Radio1.5 Radio1.6 Radio1.8 Radio1.10 Radio1.12 Radio1.13 Radio1.14 Radio1.15 Radio1.X@92.795,54 U1.5 U1.6 U1.7 U1.8 U1.9 U1.10 U1.11 U1.12 U1.13 U1.14 U1.15 U1.16 U1.17 U1.18 U1.19 U1.21 U1.22 U1.23 U1.28 U1.29 U1.37 U1.38 U1.39 U1.40 U1.41 U1.42 U1.43 U1.44 U1.46 U1.47 U1.48 U1.49 U1.50 U1.55 U3.1 U3.7 U3.12 U3.13 U3.15 U4.20 U4.33 U4.34 U4.43 U4.44 U4.47 U4.48 U4.49 U4.52 U4.53 U4.54 U4.57 U4.58 U4.59 U4.77 U4.78 U4.79 U4.80 U5.8 U5.9 U5.10 U7.5 U7.6 U7.21 U7.22 U7.32 U10.7 U10.8 U10.9 U10.14 U10.15 U10.16 U12.1 U12.2 U12.3 X1.A2 X1.A3 X1.A8 X1.A10 X1.A11 X1.B2 X1.B3 X1.B8 X1.B10 X1.B11 X2.A2 X2.A3 X2.A8 X2.A10 X2.A11 X2.B2 X2.B3 X2.B8 X2.B10 X2.B11 X3.A2 X3.A3 X3.A8 X3.A10 X3.A11 X3.B2 X3.B3 X3.B8 X3.B10 X3.B11 X4.A2 X4.A3 X4.A8 X4.A10 X4.A11 X4.B2 X4.B3 X4.B8 X4.B10 X4.B11 X5.A2 X5.A3 X5.A8 X5.A10 X5.A11 X5.B2 X5.B3 X5.B8 X5.B10 X5.B11 X7.A2 X7.A3 X7.A4 X7.A8 X7.A9 X7.A10 X7.A11 X7.B2 X7.B3 X7.B4 X7.B8 X7.B9 X7.B10 X7.B11 Y2.3 Y2.4

## Polygon pours and split planes (outlines as drawn)
GND on Ground Layer "GND Plane" (solid, remove dead copper, pour order 2): 0,99 60,99 60,0 0,0
+3V3 on Power Layer "+3V3 Poly" (solid, remove dead copper, pour order 6): 8,99 52,99 52,8 8,8
+5V on Power Layer "+5V Poly" (solid, remove dead copper, pour order 5): 16.5,34 16.5,18 21,18 21,24.5 50,24.5 50,74 38.5,74 38.5,34
Earth on Power Layer "Earth" (solid, remove dead copper, pour order 3): 52,99 60,99 60,0 0,0 0,99 8,99 8,8 52,8
GND on Top Layer "Top GND Poly" (hatched 45Degree grid 0.508 track 0.203, remove dead copper, pour order 8): 0,99 0,0 60,0 60,99
GND on Bottom Layer "Bottom GND Poly" (hatched 45Degree grid 0.508 track 0.203, remove dead copper, pour order 7): 0,99 0,0 60,0 60,99

## Keep-outs
Keep-Out Layer:
  the board outline again, w0.1

## Other copper
Top Layer:
  pour cut-out: 0,88.25 24.075,88.25 24.075,77.25 0,77.25
  pour cut-out: 0,64.25 14.75,64.25 14.75,55.75 0,55.75

## Silkscreen, mask and mechanical layers (free items; w line width, h text height)
Top Overlay:
  drawing of 13 lines, arcs and shapes, not listed
  text "Servo" at 53.167,89.395 h1
  text "UART0" at 9.502,86.665 h1
  text "UART1" at 16.844,86.665 h1
  text "1" at 58.75,85.85 h1
  text "2" at 58.75,83.31 h1
  text "3" at 58.75,80.77 h1
  text "ESP32" at 1,78.5 h1
  text "4" at 58.75,78.23 h1
  text "I2C" at 38.586,76.71 h1
  text "I2C" at 49.586,76.71 h1
  text "TX" at 44.5,75.2 h1 r90
  text "RX" at 46.5,75.2 h1 r90
  text "/TRIP" at 46.501,68.75 h1
  text "nRF24L01P" at 1,54.5 h1
  text "CS" at 20.667,53 h1
  text "CE" at 24.167,53 h1
  text "RP2350B" at 1,51.75 h1
  text "nRF" at 19.5,49.667 h1 r90
  text "Pi Control / Board" at 38.352,36.971 h1.5
  text "V0" at 44.459,34.125 h1.25
  text "RUN" at 3.617,32.35 h1
  text "BOOT" at 7.217,32.35 h1
  text "SCL" at 24.5,22.084 h1 r90
  text "SDA" at 28,22.084 h1 r90
  text "+5V" at 17.5,16.25 h1 r90
  text "USB VIN" at 21,16.25 h1 r90
  text "+3V3" at 24.5,16.25 h1 r90
  text "GND" at 28,16.25 h1 r90
  text "EARTH" at 31.5,16.25 h1 r90
  text "+5V" at 9.417,9.65 h1
  text "GND" at 14.497,9.65 h1
  text "ESP32" at 21.92,5.25 h1 r90
  text "RP2350" at 27,5.25 h1 r90
  text "\EN1" at 48.5,3.918 h1 r90
  text "\OC1" at 52,3.918 h1 r90
  text "Pi" at 31.667,3 h1
  text "RESET" at 45,2.585 h1 r90
Bottom Overlay:
  region: 35.25,32.71 35.25,33.295 35.886,33.295 35.886,32.659 35.25,32.659 35.25,32.709
  region: 42.25,32.819 42.25,32.659 41.614,32.659 41.614,33.295 42.25,33.295 42.25,32.821
  region: 39.658,29.477 39.068,29.477 39.068,30.114 39.705,30.114 39.705,29.477 39.659,29.477
  region: 37.858,30.114 38.432,30.114 38.432,29.477 37.795,29.477 37.795,30.114 37.857,30.114
  region: 35.886,30.985 35.886,31.386 36.523,31.386 36.523,32.023 35.886,32.023 35.886,32.659 37.159,32.659 37.159,31.386 37.795,31.386 37.795,32.659 37.159,32.659 37.159,33.932 37.795,33.932 37.795,33.295 39.705,33.295 39.705,33.932 40.341,33.932 40.341,32.659 39.705,32.659 39.705,31.386 40.341,31.386 40.341,32.659 41.614,32.659 41.614,32.023 40.977,32.023 40.977,31.386 41.614,31.386 41.614,30.75 42.25,30.75 42.25,29.477 41.614,29.477 41.614,30.114 40.977,30.114 40.977,30.75 40.341,30.75 40.341,30.114 39.705,30.114 39.705,30.75 37.795,30.75 37.795,30.114 37.159,30.114 37.159,30.75 36.523,30.75 36.523,30.114 35.886,30.114 35.886,29.477 35.25,29.477 35.25,30.75 35.886,30.75 35.886,30.984
  lines w0.254: 41.75,54.758 42.258,54.25 ; 42.258,55.258 41.75,54.75 49,54.75 49,62 49.508,61.492 ; 48.5,61.492 49.008,62 ; 49.8,5.5 51.5,5.5 50.992,6.008 ; 50.992,5 51.5,5.508
  text "Relay" at 38.249,61.25 h1
  text "Board" at 48.25,57.3 h1.2
  text "Dim" at 48.25,55.5 h1.2
  text "99mm" at 49.75,55.076 h1.2 r270
  text "Buzzer" at 38.749,53.25 h1
  text "60mm" at 47.574,53.05 h1.2
  text "Designed by / Russell MacGregor" at 47.124,24.517 h1
  text "M3.5" at 49.25,4.9 h1.2
Poly Pour Planning:
  lines w0.2: 0,0 60,0 60,99 52,99 52,8 8,8 8,99 0,99 0,0 ; 16.5,18 21,18 21,24.5 50,24.5 50,74 38.5,74 38.5,34 16.5,34 16.5,18
  text "Earth" at 52.751,97.5 h1
  text "3V3" at 11.667,96 h1
  text "5V" at 39.417,72.25 h1

## Text inside footprints (layer, text, board x,y; h text height)
C60: Bottom Overlay "+" at 10.75,28 h1.5 r270
C61: Bottom Overlay "+" at 24.95,24.1 h1.5 r270
X6: Top Overlay "2-Pin Screw / Term" at 8.718,6.345 h0.75; Top Overlay "[Front]" at 8.868,1.458 h0.75